# EAGLE board 13490-Pi_grammer_MAIN-panel.v10 (EAGLE 7.5.0), part 1 of 2
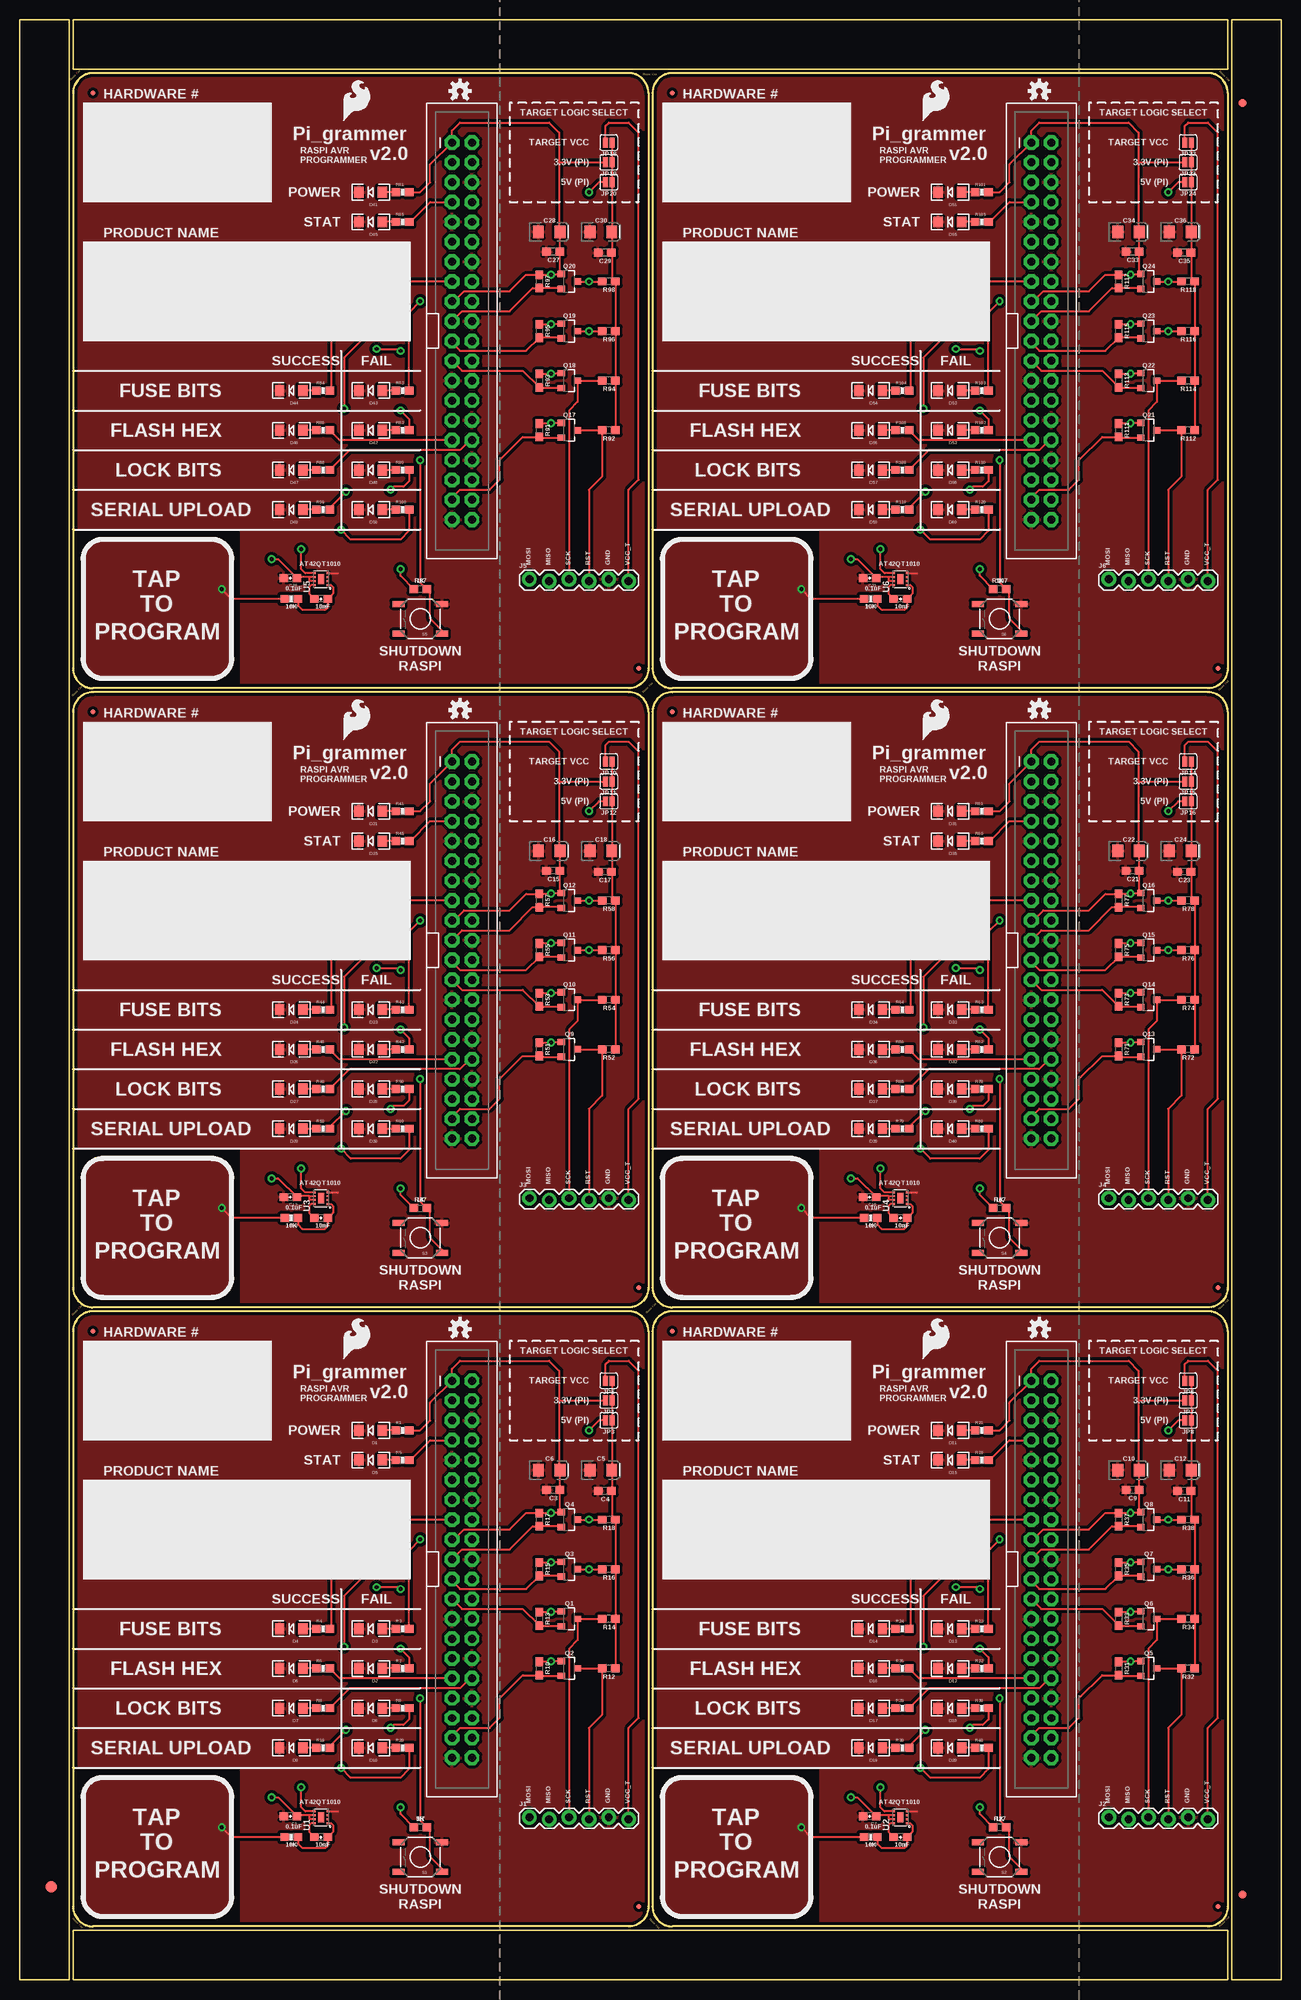
[diagram p0: board, top side]
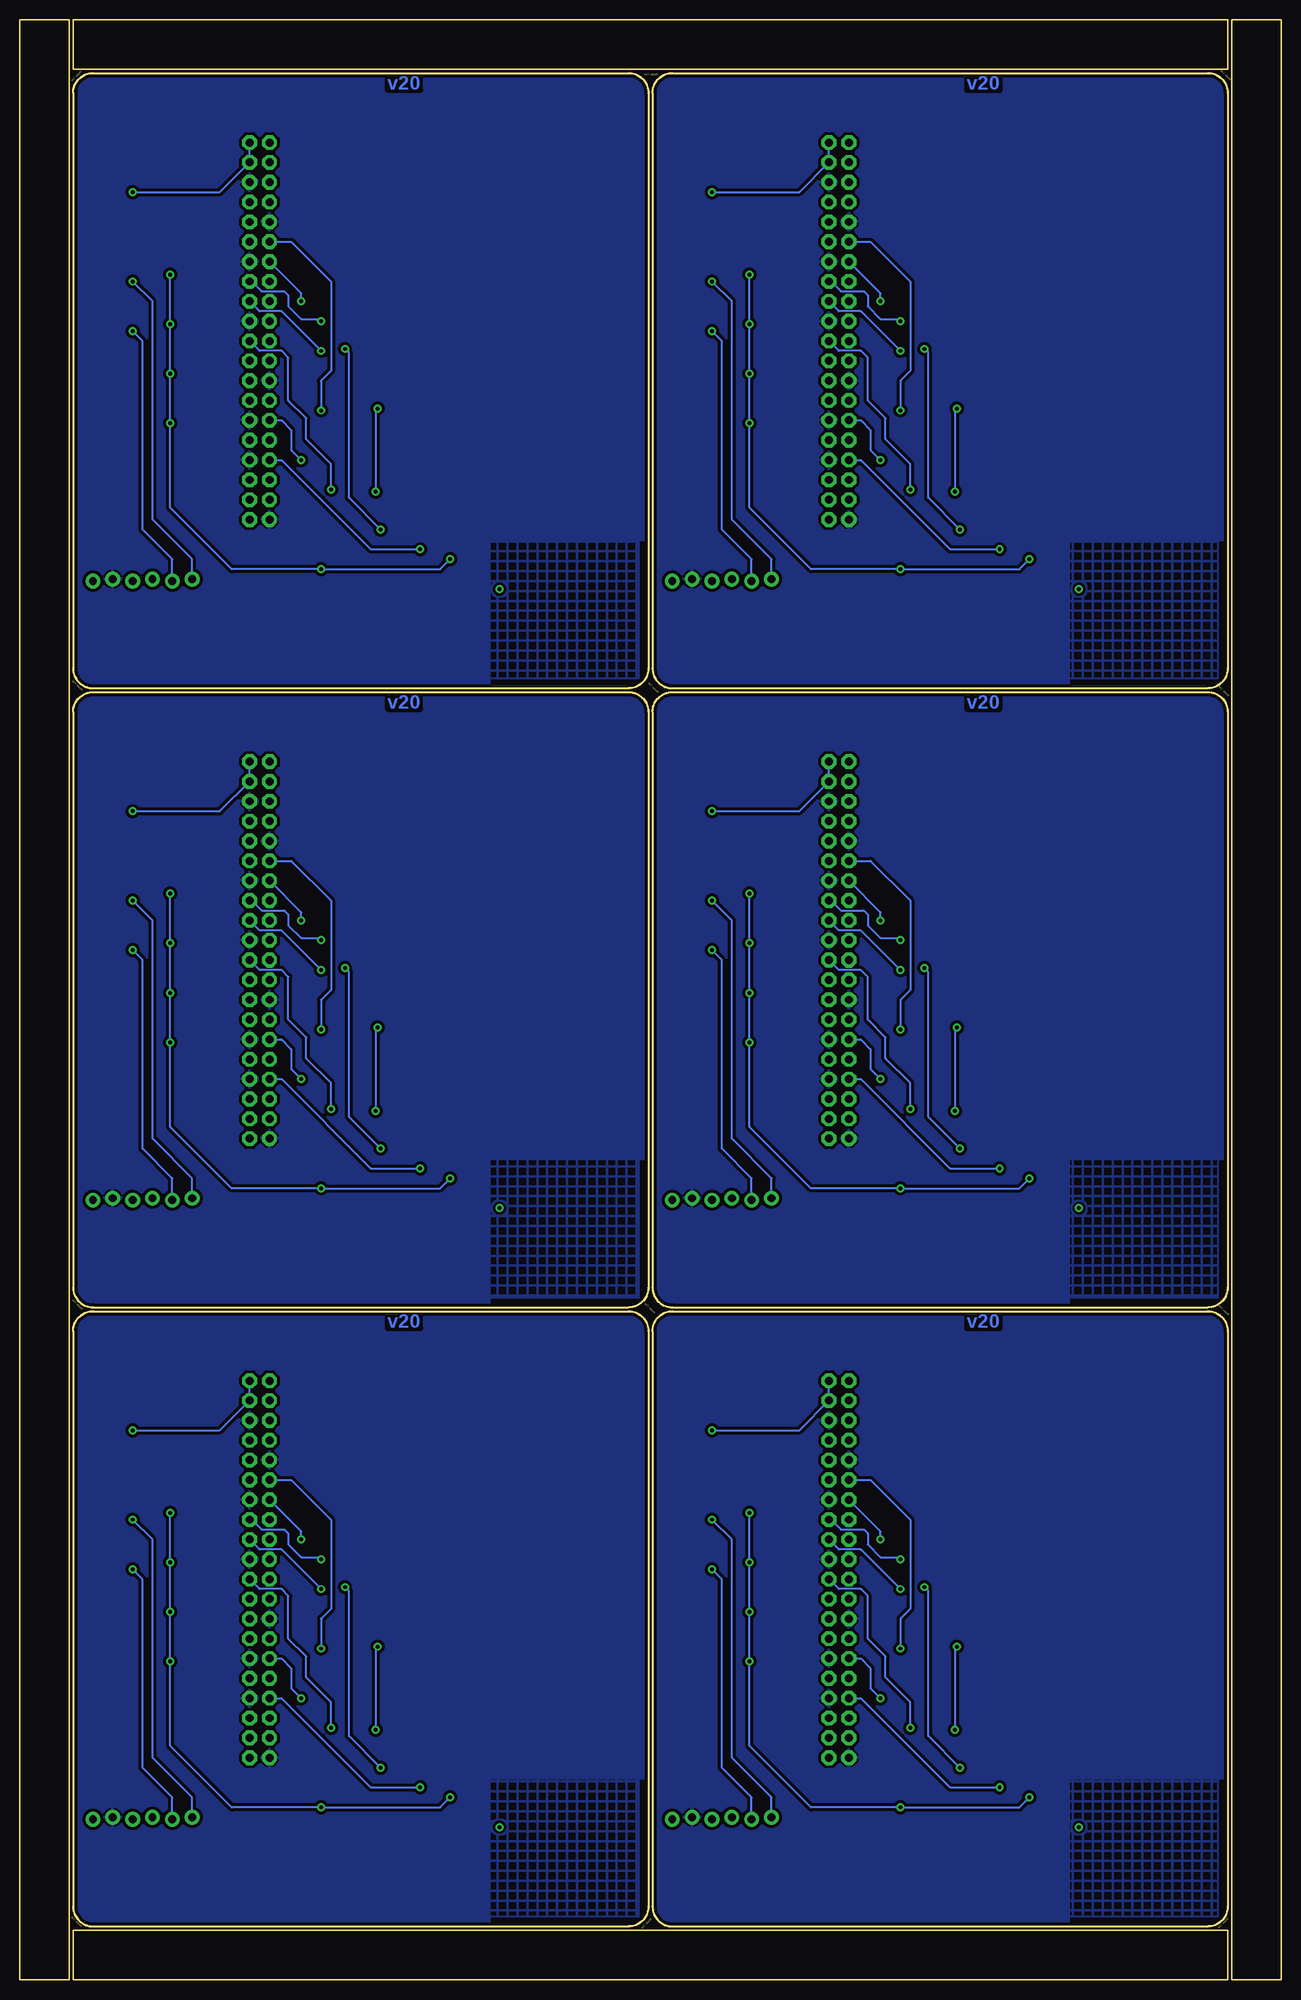
[diagram p1: board, bottom side, seen from below]

Size 161.54 x 250.95 mm. Coordinates in mm from the lower left corner, seen from the top.
Outline: 79.25,0 6.86,0 6.86,6.35 29.72,6.35
Outline: 27.18,6.35 154.69,6.35 154.69,0 76.71,0
Outline: 6.35,72.39 6.35,0 0,0 0,22.86
Outline: 0,20.32 0,250.95 6.35,250.95 6.35,69.85
Outline: 82.3,250.95 154.69,250.95 154.69,244.6 131.83,244.6
Outline: 134.37,244.6 6.86,244.6 6.86,250.95 84.84,250.95
Outline: 155.19,178.56 155.19,250.95 161.54,250.95 161.54,228.09
Outline: 161.54,230.63 161.54,0 155.19,0 155.19,181.1
Outline: 80.52,83.06 arc90 77.98,85.6 9.4,85.6 arc90 6.86,83.06 6.86,9.4 arc90 9.4,6.86 77.98,6.86 arc90 80.52,9.4 80.52,83.06
Outline: 154.69,83.06 arc90 152.15,85.6 83.57,85.6 arc90 81.03,83.06 81.03,9.4 arc90 83.57,6.86 152.15,6.86 arc90 154.69,9.4 154.69,83.06
Outline: 80.52,162.31 arc90 77.98,164.85 9.4,164.85 arc90 6.86,162.31 6.86,88.65 arc90 9.4,86.11 77.98,86.11 arc90 80.52,88.65 80.52,162.31
Outline: 154.69,162.31 arc90 152.15,164.85 83.57,164.85 arc90 81.03,162.31 81.03,88.65 arc90 83.57,86.11 152.15,86.11 arc90 154.69,88.65 154.69,162.31
Outline: 80.52,241.55 arc90 77.98,244.09 9.4,244.09 arc90 6.86,241.55 6.86,167.89 arc90 9.4,165.35 77.98,165.35 arc90 80.52,167.89 80.52,241.55
Outline: 154.69,241.55 arc90 152.15,244.09 83.57,244.09 arc90 81.03,241.55 81.03,167.89 arc90 83.57,165.35 152.15,165.35 arc90 154.69,167.89 154.69,241.55
Copper layers (1*16): Top 0.035mm / dielectric 1.5mm / Bottom 0.035mm
Design rules "SparkFun-2-layer *": minimum track width 10mil, minimum drill 20mil, track to track 8mil, track to pad 8mil, pad to pad 8mil, via to via 8mil, smd to smd 8mil, copper to edge 8mil, drill to drill 8mil, minimum pad ring 12mil, minimum via ring 10mil, stop-mask expansion 4mil, vias tented up to drill 20mil, thermal gap 10mil

## Footprints (pad centres in the part's own frame; a part is rotated, then mirrored left to right if it is on the bottom)
0603-CAP = smd 1.1 x 1: 1 -0.85,0; 2 0.85,0
0603 = smd 1.1 x 1: 1 -0.85,0; 2 0.85,0
EIA3216 = smd 1.4 x 1.6: + 1.4,0; - -1.4,0
LED-1206 = smd 1.2 x 1.4: A -1.5,0; C 1.5,0
FIDUCIAL-1.5X3 = smd 1.5 x 1.5: 1 0,0
FIDUCIAL-1X2 = smd 1 x 1: 1 0,0
MICRO-FIDUCIAL = smd 0.635 x 0.635: 1 0,0
1X06_LOCK = drill 1.016 pad 1.88: 1 0,0; 2 2.54,-0.254; 3 5.08,0; 4 7.62,-0.254; 5 10.16,0; 6 12.7,-0.254
SMT-JUMPER_2_NO_SILK = smd 0.635 x 1.27: 1 -0.406,0; 2 0.406,0
2X20-SHROUDED = drill 1.016 pad 1.88 octagon: 1 -1.27,24.13; 2 1.27,24.13; 3 -1.27,21.59; 4 1.27,21.59; 5 -1.27,19.05; 6 1.27,19.05; 7 -1.27,16.51; 8 1.27,16.51; 9 -1.27,13.97; 10 1.27,13.97; 11 -1.27,11.43; 12 1.27,11.43; 13 -1.27,8.89; 14 1.27,8.89; 15 -1.27,6.35; 16 1.27,6.35; 17 -1.27,3.81; 18 1.27,3.81; 19 -1.27,1.27; 20 1.27,1.27; 21 -1.27,-1.27; 22 1.27,-1.27; 23 -1.27,-3.81; 24 1.27,-3.81; 25 -1.27,-6.35; 26 1.27,-6.35; 27 -1.27,-8.89; 28 1.27,-8.89; 29 -1.27,-11.43; 30 1.27,-11.43; 31 -1.27,-13.97; 32 1.27,-13.97; 33 -1.27,-16.51; 34 1.27,-16.51; 35 -1.27,-19.05; 36 1.27,-19.05; 37 -1.27,-21.59; 38 1.27,-21.59; 39 -1.27,-24.13; 40 1.27,-24.13
SOT23-3 = smd 0.8 x 0.9: 1 -0.95,-1; 2 0.95,-1; 3 0,1.1
0603-RES = smd 1.1 x 1: 1 -0.85,0; 2 0.85,0
TACTILE-SWITCH-SMD = smd 1.524 x 0.762: 1 -2.794,1.905; 2 2.794,1.905; 3 -2.794,-1.905; 4 2.794,-1.905
UDFN/USON_8_PAD = smd 0.25 x 0.3: 1 -0.75,-0.852; 2 -0.25,-0.852; 3 0.25,-0.852; 4 0.75,-0.852; 5 0.75,0.852; 6 0.25,0.852; 7 -0.25,0.852; 8 -0.75,0.852 | smd 1.3 x 0.8: P$1 0,0

## Placement (x,y rotation side)
C1  0.1uF  [0603-CAP]  34.67,20.95 180 top
C2  10nF  [0603-CAP]  38.61,18.29 180 top
C3  0.1uF  [0603]  68.33,62.74 180 top
C4  0.1uF  [0603]  74.93,62.61 180 top
C5  10uF  [EIA3216]  74.42,65.28 0 top
C6  10uF  [EIA3216]  67.82,65.28 0 top
C7  0.1uF  [0603-CAP]  108.84,20.95 180 top
C8  10nF  [0603-CAP]  112.78,18.29 180 top
C9  0.1uF  [0603]  142.49,62.74 180 top
C10  10uF  [EIA3216]  141.99,65.28 0 top
C11  0.1uF  [0603]  149.1,62.61 180 top
C12  10uF  [EIA3216]  148.59,65.28 0 top
C13  0.1uF  [0603-CAP]  34.67,100.2 180 top
C14  10nF  [0603-CAP]  38.61,97.54 180 top
C15  0.1uF  [0603]  68.33,141.99 180 top
C16  10uF  [EIA3216]  67.82,144.53 0 top
C17  0.1uF  [0603]  74.93,141.86 180 top
C18  10uF  [EIA3216]  74.42,144.53 0 top
C19  0.1uF  [0603-CAP]  108.84,100.2 180 top
C20  10nF  [0603-CAP]  112.78,97.54 180 top
C21  0.1uF  [0603]  142.49,141.99 180 top
C22  10uF  [EIA3216]  141.99,144.53 0 top
C23  0.1uF  [0603]  149.1,141.86 180 top
C24  10uF  [EIA3216]  148.59,144.53 0 top
C25  0.1uF  [0603-CAP]  34.67,179.45 180 top
C26  10nF  [0603-CAP]  38.61,176.78 180 top
C27  0.1uF  [0603]  68.33,221.23 180 top
C28  10uF  [EIA3216]  67.82,223.77 0 top
C29  0.1uF  [0603]  74.93,221.11 180 top
C30  10uF  [EIA3216]  74.42,223.77 0 top
C31  0.1uF  [0603-CAP]  108.84,179.45 180 top
C32  10nF  [0603-CAP]  112.78,176.78 180 top
C33  0.1uF  [0603]  142.49,221.23 180 top
C34  10uF  [EIA3216]  141.99,223.77 0 top
C35  0.1uF  [0603]  149.1,221.11 180 top
C36  10uF  [EIA3216]  148.59,223.77 0 top
D1  GREEN  [LED-1206]  44.96,70.36 180 top
D2  RED  [LED-1206]  44.96,39.88 180 top
D3  RED  [LED-1206]  44.96,44.96 180 top
D4  GREEN  [LED-1206]  34.8,44.96 180 top
D5  GREEN  [LED-1206]  44.96,66.55 180 top
D6  GREEN  [LED-1206]  34.8,39.88 180 top
D7  GREEN  [LED-1206]  34.8,34.8 180 top
D8  RED  [LED-1206]  44.96,34.8 180 top
D9  GREEN  [LED-1206]  34.8,29.72 180 top
D10  RED  [LED-1206]  44.96,29.72 180 top
D11  GREEN  [LED-1206]  119.13,70.36 180 top
D12  RED  [LED-1206]  119.13,39.88 180 top
D13  RED  [LED-1206]  119.13,44.96 180 top
D14  GREEN  [LED-1206]  108.97,44.96 180 top
D15  GREEN  [LED-1206]  119.13,66.55 180 top
D16  GREEN  [LED-1206]  108.97,39.88 180 top
D17  GREEN  [LED-1206]  108.97,34.8 180 top
D18  RED  [LED-1206]  119.13,34.8 180 top
D19  GREEN  [LED-1206]  108.97,29.72 180 top
D20  RED  [LED-1206]  119.13,29.72 180 top
D21  GREEN  [LED-1206]  44.96,149.61 180 top
D22  RED  [LED-1206]  44.96,119.13 180 top
D23  RED  [LED-1206]  44.96,124.21 180 top
D24  GREEN  [LED-1206]  34.8,124.21 180 top
D25  GREEN  [LED-1206]  44.96,145.8 180 top
D26  GREEN  [LED-1206]  34.8,119.13 180 top
D27  GREEN  [LED-1206]  34.8,114.05 180 top
D28  RED  [LED-1206]  44.96,114.05 180 top
D29  GREEN  [LED-1206]  34.8,108.97 180 top
D30  RED  [LED-1206]  44.96,108.97 180 top
D31  GREEN  [LED-1206]  119.13,149.61 180 top
D32  RED  [LED-1206]  119.13,119.13 180 top
D33  RED  [LED-1206]  119.13,124.21 180 top
D34  GREEN  [LED-1206]  108.97,124.21 180 top
D35  GREEN  [LED-1206]  119.13,145.8 180 top
D36  GREEN  [LED-1206]  108.97,119.13 180 top
D37  GREEN  [LED-1206]  108.97,114.05 180 top
D38  RED  [LED-1206]  119.13,114.05 180 top
D39  GREEN  [LED-1206]  108.97,108.97 180 top
D40  RED  [LED-1206]  119.13,108.97 180 top
D41  GREEN  [LED-1206]  44.96,228.85 180 top
D42  RED  [LED-1206]  44.96,198.37 180 top
D43  RED  [LED-1206]  44.96,203.45 180 top
D44  GREEN  [LED-1206]  34.8,203.45 180 top
D45  GREEN  [LED-1206]  44.96,225.04 180 top
D46  GREEN  [LED-1206]  34.8,198.37 180 top
D47  GREEN  [LED-1206]  34.8,193.29 180 top
D48  RED  [LED-1206]  44.96,193.29 180 top
D49  GREEN  [LED-1206]  34.8,188.21 180 top
D50  RED  [LED-1206]  44.96,188.21 180 top
D51  GREEN  [LED-1206]  119.13,228.85 180 top
D52  RED  [LED-1206]  119.13,198.37 180 top
D53  RED  [LED-1206]  119.13,203.45 180 top
D54  GREEN  [LED-1206]  108.97,203.45 180 top
D55  GREEN  [LED-1206]  119.13,225.04 180 top
D56  GREEN  [LED-1206]  108.97,198.37 180 top
D57  GREEN  [LED-1206]  108.97,193.29 180 top
D58  RED  [LED-1206]  119.13,193.29 180 top
D59  GREEN  [LED-1206]  108.97,188.21 180 top
D60  RED  [LED-1206]  119.13,188.21 180 top
E$1  [FIDUCIAL-1.5X3]  4.06,11.94 0 top
E$7  [FIDUCIAL-1X2]  156.59,240.28 180 top
E$8  [FIDUCIAL-1X2]  156.59,10.92 0 top
FD1  FIDUCIALUFIDUCIAL  [MICRO-FIDUCIAL]  9.4,83.06 0 top
FD2  FIDUCIALUFIDUCIAL  [MICRO-FIDUCIAL]  79.25,9.4 0 top
FD3  FIDUCIALUFIDUCIAL  [MICRO-FIDUCIAL]  83.57,83.06 0 top
FD4  FIDUCIALUFIDUCIAL  [MICRO-FIDUCIAL]  153.42,9.4 0 top
FD5  FIDUCIALUFIDUCIAL  [MICRO-FIDUCIAL]  9.4,162.31 0 top
FD6  FIDUCIALUFIDUCIAL  [MICRO-FIDUCIAL]  79.25,88.65 0 top
FD7  FIDUCIALUFIDUCIAL  [MICRO-FIDUCIAL]  83.57,162.31 0 top
FD8  FIDUCIALUFIDUCIAL  [MICRO-FIDUCIAL]  153.42,88.65 0 top
FD9  FIDUCIALUFIDUCIAL  [MICRO-FIDUCIAL]  9.4,241.55 0 top
FD10  FIDUCIALUFIDUCIAL  [MICRO-FIDUCIAL]  79.25,167.89 0 top
FD11  FIDUCIALUFIDUCIAL  [MICRO-FIDUCIAL]  83.57,241.55 0 top
FD12  FIDUCIALUFIDUCIAL  [MICRO-FIDUCIAL]  153.42,167.89 0 top
J1  TARGET_copy  [1X06_LOCK]  65.28,20.83 0 top
J2  TARGET_copy  [1X06_LOCK]  139.45,20.83 0 top
J3  TARGET_copy  [1X06_LOCK]  65.28,100.08 0 top
J4  TARGET_copy  [1X06_LOCK]  139.45,100.08 0 top
J5  TARGET_copy  [1X06_LOCK]  65.28,179.32 0 top
J6  TARGET_copy  [1X06_LOCK]  139.45,179.32 0 top
JP1  [SMT-JUMPER_2_NO_SILK]  75.44,74.17 180 top
JP2  RASPBERRYPI-B+-GPIO  [2X20-SHROUDED]  56.64,52.58 0 top
JP3  [SMT-JUMPER_2_NO_SILK]  75.44,71.63 180 top
JP4  RASPBERRYPI-B+-GPIO  [2X20-SHROUDED]  130.81,52.58 0 top
JP5  [SMT-JUMPER_2_NO_SILK]  75.44,76.71 180 top
JP6  [SMT-JUMPER_2_NO_SILK]  149.61,76.71 180 top
JP7  [SMT-JUMPER_2_NO_SILK]  149.61,74.17 180 top
JP8  [SMT-JUMPER_2_NO_SILK]  149.61,71.63 180 top
JP9  RASPBERRYPI-B+-GPIO  [2X20-SHROUDED]  56.64,131.83 0 top
JP10  [SMT-JUMPER_2_NO_SILK]  75.44,155.96 180 top
JP11  [SMT-JUMPER_2_NO_SILK]  75.44,153.42 180 top
JP12  [SMT-JUMPER_2_NO_SILK]  75.44,150.88 180 top
JP13  RASPBERRYPI-B+-GPIO  [2X20-SHROUDED]  130.81,131.83 0 top
JP14  [SMT-JUMPER_2_NO_SILK]  149.61,155.96 180 top
JP15  [SMT-JUMPER_2_NO_SILK]  149.61,153.42 180 top
JP16  [SMT-JUMPER_2_NO_SILK]  149.61,150.88 180 top
JP17  RASPBERRYPI-B+-GPIO  [2X20-SHROUDED]  56.64,211.07 0 top
JP18  [SMT-JUMPER_2_NO_SILK]  75.44,235.2 180 top
JP19  [SMT-JUMPER_2_NO_SILK]  75.44,232.66 180 top
JP20  [SMT-JUMPER_2_NO_SILK]  75.44,230.12 180 top
JP21  RASPBERRYPI-B+-GPIO  [2X20-SHROUDED]  130.81,211.07 0 top
JP22  [SMT-JUMPER_2_NO_SILK]  149.61,235.2 180 top
JP23  [SMT-JUMPER_2_NO_SILK]  149.61,232.66 180 top
JP24  [SMT-JUMPER_2_NO_SILK]  149.61,230.12 180 top
LOGO1  SFE_LOGO_FLAME.2_INCH  [SFE_LOGO_FLAME_.2]  41.15,79.25 0 top
LOGO2  OSHW-LOGOS  [OSHW-LOGO-S]  56.39,83.31 0 top
LOGO3  OSHW-LOGOS  [OSHW-LOGO-S]  130.56,83.31 0 top
LOGO4  SFE_LOGO_FLAME.2_INCH  [SFE_LOGO_FLAME_.2]  115.32,79.25 0 top
LOGO5  OSHW-LOGOS  [OSHW-LOGO-S]  56.39,162.56 0 top
LOGO6  SFE_LOGO_FLAME.2_INCH  [SFE_LOGO_FLAME_.2]  41.15,158.5 0 top
LOGO7  OSHW-LOGOS  [OSHW-LOGO-S]  130.56,162.56 0 top
LOGO8  SFE_LOGO_FLAME.2_INCH  [SFE_LOGO_FLAME_.2]  115.32,158.5 0 top
LOGO9  OSHW-LOGOS  [OSHW-LOGO-S]  56.39,241.81 0 top
LOGO10  SFE_LOGO_FLAME.2_INCH  [SFE_LOGO_FLAME_.2]  41.15,237.74 0 top
LOGO11  OSHW-LOGOS  [OSHW-LOGO-S]  130.56,241.81 0 top
LOGO12  SFE_LOGO_FLAME.2_INCH  [SFE_LOGO_FLAME_.2]  115.32,237.74 0 top
Q1  220mA/50V/3.5Ω  [SOT23-3]  70.36,46.23 270 top
Q2  220mA/50V/3.5Ω  [SOT23-3]  70.36,39.88 270 top
Q3  220mA/50V/3.5Ω  [SOT23-3]  70.36,52.58 270 top
Q4  220mA/50V/3.5Ω  [SOT23-3]  70.36,58.93 270 top
Q5  220mA/50V/3.5Ω  [SOT23-3]  144.53,39.88 270 top
Q6  220mA/50V/3.5Ω  [SOT23-3]  144.53,46.23 270 top
Q7  220mA/50V/3.5Ω  [SOT23-3]  144.53,52.58 270 top
Q8  220mA/50V/3.5Ω  [SOT23-3]  144.53,58.93 270 top
Q9  220mA/50V/3.5Ω  [SOT23-3]  70.36,119.13 270 top
Q10  220mA/50V/3.5Ω  [SOT23-3]  70.36,125.48 270 top
Q11  220mA/50V/3.5Ω  [SOT23-3]  70.36,131.83 270 top
Q12  220mA/50V/3.5Ω  [SOT23-3]  70.36,138.18 270 top
Q13  220mA/50V/3.5Ω  [SOT23-3]  144.53,119.13 270 top
Q14  220mA/50V/3.5Ω  [SOT23-3]  144.53,125.48 270 top
Q15  220mA/50V/3.5Ω  [SOT23-3]  144.53,131.83 270 top
Q16  220mA/50V/3.5Ω  [SOT23-3]  144.53,138.18 270 top
Q17  220mA/50V/3.5Ω  [SOT23-3]  70.36,198.37 270 top
Q18  220mA/50V/3.5Ω  [SOT23-3]  70.36,204.72 270 top
Q19  220mA/50V/3.5Ω  [SOT23-3]  70.36,211.07 270 top
Q20  220mA/50V/3.5Ω  [SOT23-3]  70.36,217.42 270 top
Q21  220mA/50V/3.5Ω  [SOT23-3]  144.53,198.37 270 top
Q22  220mA/50V/3.5Ω  [SOT23-3]  144.53,204.72 270 top
Q23  220mA/50V/3.5Ω  [SOT23-3]  144.53,211.07 270 top
Q24  220mA/50V/3.5Ω  [SOT23-3]  144.53,217.42 270 top
R1  1K  [0603-RES]  49.02,70.36 0 top
R2  1K  [0603-RES]  49.02,39.88 0 top
R3  1K  [0603-RES]  49.02,44.96 0 top
R4  1K  [0603-RES]  38.86,44.96 0 top
R5  1K  [0603-RES]  49.02,66.55 0 top
R6  1K  [0603-RES]  38.86,39.88 0 top
R7  1k  [0603]  51.31,19.56 0 top
R8  1K  [0603-RES]  38.86,34.8 0 top
R9  1K  [0603-RES]  49.02,34.8 0 top
R10  10k  [0603]  66.55,39.88 270 top
R11  10k  [0603-RES]  34.8,18.29 180 top
R12  10k  [0603]  75.44,39.88 180 top
R13  10k  [0603]  66.55,46.23 270 top
R14  10k  [0603]  75.44,46.23 180 top
R15  10k  [0603]  66.55,52.58 270 top
R16  10k  [0603]  75.44,52.58 180 top
R17  10k  [0603]  66.55,58.93 270 top
R18  10k  [0603]  75.44,58.93 180 top
R19  1K  [0603-RES]  38.86,29.72 0 top
R20  1K  [0603-RES]  49.02,29.72 0 top
R21  1K  [0603-RES]  123.19,70.36 0 top
R22  1K  [0603-RES]  123.19,39.88 0 top
R23  1K  [0603-RES]  123.19,44.96 0 top
R24  1K  [0603-RES]  113.03,44.96 0 top
R25  1K  [0603-RES]  123.19,66.55 0 top
R26  1K  [0603-RES]  113.03,39.88 0 top
R27  1k  [0603]  125.48,19.56 0 top
R28  1K  [0603-RES]  113.03,34.8 0 top
R29  10k  [0603-RES]  108.97,18.29 180 top
R30  1K  [0603-RES]  123.19,34.8 0 top
R31  10k  [0603]  140.72,39.88 270 top
R32  10k  [0603]  149.61,39.88 180 top
R33  10k  [0603]  140.72,46.23 270 top
R34  10k  [0603]  149.61,46.23 180 top
R35  10k  [0603]  140.72,52.58 270 top
R36  10k  [0603]  149.61,52.58 180 top
R37  10k  [0603]  140.72,58.93 270 top
R38  10k  [0603]  149.61,58.93 180 top
R39  1K  [0603-RES]  113.03,29.72 0 top
R40  1K  [0603-RES]  123.19,29.72 0 top
R41  1K  [0603-RES]  49.02,149.61 0 top
R42  1K  [0603-RES]  49.02,119.13 0 top
R43  1K  [0603-RES]  49.02,124.21 0 top
R44  1K  [0603-RES]  38.86,124.21 0 top
R45  1K  [0603-RES]  49.02,145.8 0 top
R46  1K  [0603-RES]  38.86,119.13 0 top
R47  1k  [0603]  51.31,98.81 0 top
R48  1K  [0603-RES]  38.86,114.05 0 top
R49  10k  [0603-RES]  34.8,97.54 180 top
R50  1K  [0603-RES]  49.02,114.05 0 top
R51  10k  [0603]  66.55,119.13 270 top
R52  10k  [0603]  75.44,119.13 180 top
R53  10k  [0603]  66.55,125.48 270 top
R54  10k  [0603]  75.44,125.48 180 top
R55  10k  [0603]  66.55,131.83 270 top
R56  10k  [0603]  75.44,131.83 180 top
R57  10k  [0603]  66.55,138.18 270 top
R58  10k  [0603]  75.44,138.18 180 top
R59  1K  [0603-RES]  38.86,108.97 0 top
R60  1K  [0603-RES]  49.02,108.97 0 top
R61  1K  [0603-RES]  123.19,149.61 0 top
R62  1K  [0603-RES]  123.19,119.13 0 top
R63  1K  [0603-RES]  123.19,124.21 0 top
R64  1K  [0603-RES]  113.03,124.21 0 top
R65  1K  [0603-RES]  123.19,145.8 0 top
R66  1K  [0603-RES]  113.03,119.13 0 top
R67  1k  [0603]  125.48,98.81 0 top
R68  1K  [0603-RES]  113.03,114.05 0 top
R69  10k  [0603-RES]  108.97,97.54 180 top
R70  1K  [0603-RES]  123.19,114.05 0 top
R71  10k  [0603]  140.72,119.13 270 top
R72  10k  [0603]  149.61,119.13 180 top
R73  10k  [0603]  140.72,125.48 270 top
R74  10k  [0603]  149.61,125.48 180 top
R75  10k  [0603]  140.72,131.83 270 top
R76  10k  [0603]  149.61,131.83 180 top
R77  10k  [0603]  140.72,138.18 270 top
R78  10k  [0603]  149.61,138.18 180 top
R79  1K  [0603-RES]  113.03,108.97 0 top
R80  1K  [0603-RES]  123.19,108.97 0 top
R81  1K  [0603-RES]  49.02,228.85 0 top
R82  1K  [0603-RES]  49.02,198.37 0 top
R83  1K  [0603-RES]  49.02,203.45 0 top
R84  1K  [0603-RES]  38.86,203.45 0 top
R85  1K  [0603-RES]  49.02,225.04 0 top
R86  1K  [0603-RES]  38.86,198.37 0 top
R87  1k  [0603]  51.31,178.05 0 top
R88  1K  [0603-RES]  38.86,193.29 0 top
R89  10k  [0603-RES]  34.8,176.78 180 top
R90  1K  [0603-RES]  49.02,193.29 0 top
R91  10k  [0603]  66.55,198.37 270 top
R92  10k  [0603]  75.44,198.37 180 top
R93  10k  [0603]  66.55,204.72 270 top
R94  10k  [0603]  75.44,204.72 180 top
R95  10k  [0603]  66.55,211.07 270 top
R96  10k  [0603]  75.44,211.07 180 top
R97  10k  [0603]  66.55,217.42 270 top
R98  10k  [0603]  75.44,217.42 180 top
R99  1K  [0603-RES]  38.86,188.21 0 top
R100  1K  [0603-RES]  49.02,188.21 0 top
R101  1K  [0603-RES]  123.19,228.85 0 top
R102  1K  [0603-RES]  123.19,198.37 0 top
R103  1K  [0603-RES]  123.19,203.45 0 top
R104  1K  [0603-RES]  113.03,203.45 0 top
R105  1K  [0603-RES]  123.19,225.04 0 top
R106  1K  [0603-RES]  113.03,198.37 0 top
R107  1k  [0603]  125.48,178.05 0 top
R108  1K  [0603-RES]  113.03,193.29 0 top
R109  10k  [0603-RES]  108.97,176.78 180 top
R110  1K  [0603-RES]  123.19,193.29 0 top
R111  10k  [0603]  140.72,198.37 270 top
R112  10k  [0603]  149.61,198.37 180 top
R113  10k  [0603]  140.72,204.72 270 top
R114  10k  [0603]  149.61,204.72 180 top
R115  10k  [0603]  140.72,211.07 270 top
R116  10k  [0603]  149.61,211.07 180 top
R117  10k  [0603]  140.72,217.42 270 top
R118  10k  [0603]  149.61,217.42 180 top
R119  1K  [0603-RES]  113.03,188.21 0 top
R120  1K  [0603-RES]  123.19,188.21 0 top
S1  [TACTILE-SWITCH-SMD]  51.31,15.75 180 top
S2  [TACTILE-SWITCH-SMD]  125.48,15.75 180 top
S3  [TACTILE-SWITCH-SMD]  51.31,95 180 top
S4  [TACTILE-SWITCH-SMD]  125.48,95 180 top
S5  [TACTILE-SWITCH-SMD]  51.31,174.24 180 top
S6  [TACTILE-SWITCH-SMD]  125.48,174.24 180 top
U1  AT42QT1010UDFN  [UDFN/USON_8_PAD]  38.61,20.83 90 top
U2  AT42QT1010UDFN  [UDFN/USON_8_PAD]  112.78,20.83 90 top
U3  AT42QT1010UDFN  [UDFN/USON_8_PAD]  38.61,100.08 90 top
U4  AT42QT1010UDFN  [UDFN/USON_8_PAD]  112.78,100.08 90 top
U5  AT42QT1010UDFN  [UDFN/USON_8_PAD]  38.61,179.32 90 top
U6  AT42QT1010UDFN  [UDFN/USON_8_PAD]  112.78,179.32 90 top

## Library data of the parts
C1 C3 C4 C7 C9 C11 C13 C15 C17 C19 C21 C23 C25 C27 C29 C31 C33 C35 = SparkFun-Capacitors; PROD_ID: CAP-00810
C2 C8 C14 C20 C26 C32 = SparkFun-Capacitors; PROD_ID: CAP-00867
C5 C6 C10 C12 C16 C18 C22 C24 C28 C30 C34 C36 = SparkFun-Capacitors; PROD_ID: CAP-00811
D1 D4-D7 D9 D11 D14-D17 D19 D21 D24-D27 D29 D31 D34-D37 D39 D41 D44-D47 D49 D51 D54-D57 D59 = SparkFun-LED; PROD_ID: DIO-00862
D2 D3 D8 D10 D12 D13 D18 D20 D22 D23 D28 D30 D32 D33 D38 D40 D42 D43 D48 D50 D52 D53 D58 D60 = SparkFun-LED; PROD_ID: DIO-09912
E$1 = SparkFun-Retired
E$7 E$8 FD1-FD12 LOGO1-LOGO12 = SparkFun-Aesthetics
J1-J6 = SparkFun-Connectors; PROD_ID: CONN-10140
JP1 JP3 JP5-JP8 JP10-JP12 JP14-JP16 JP18-JP20 JP22-JP24 = SparkFun-Jumpers
JP2 JP4 JP9 JP13 JP17 JP21 = SparkFun-Boards
Q1-Q24 = SparkFun-DiscreteSemi; PROD_ID: TRANS-00830
R1-R9 R19-R28 R30 R39-R48 R50 R59-R68 R70 R79-R88 R90 R99-R108 R110 R119 R120 = SparkFun-Resistors; PROD_ID: RES-07856
R10-R18 R29 R31-R38 R49 R51-R58 R69 R71-R78 R89 R91-R98 R109 R111-R118 = SparkFun-Resistors; PROD_ID: RES-00824
S1-S6 = SparkFun-Electromechanical; PROD_ID: SWCH-08247
U1-U6 = Testing; PROD_ID: IC-11778

## Nets
3.3V: C1.1 C3.1 C6.+ JP1.2 JP2.1 JP2.17 Q1.1 Q2.1 Q3.1 Q4.1 R1.2 R7.1 R10.1 R13.1 R15.1 R17.1 U1.6 U1.7
3.3V1: C7.1 C9.1 C10.+ JP4.1 JP4.17 JP7.2 Q5.1 Q6.1 Q7.1 Q8.1 R21.2 R27.1 R31.1 R33.1 R35.1 R37.1 U2.6 U2.7
3.3V2: C13.1 C15.1 C16.+ JP9.1 JP9.17 JP11.2 Q9.1 Q10.1 Q11.1 Q12.1 R41.2 R47.1 R51.1 R53.1 R55.1 R57.1 U3.6 U3.7
3.3V3: C19.1 C21.1 C22.+ JP13.1 JP13.17 JP15.2 Q13.1 Q14.1 Q15.1 Q16.1 R61.2 R67.1 R71.1 R73.1 R75.1 R77.1 U4.6 U4.7
3.3V4: C25.1 C27.1 C28.+ JP17.1 JP17.17 JP19.2 Q17.1 Q18.1 Q19.1 Q20.1 R81.2 R87.1 R91.1 R93.1 R95.1 R97.1 U5.6 U5.7
3.3V5: C31.1 C33.1 C34.+ JP21.1 JP21.17 JP23.2 Q21.1 Q22.1 Q23.1 Q24.1 R101.2 R107.1 R111.1 R113.1 R115.1 R117.1 U6.6 U6.7
5V: JP2.2 JP2.4 JP3.2
5V1: JP4.2 JP4.4 JP8.2
5V2: JP9.2 JP9.4 JP12.2
5V3: JP13.2 JP13.4 JP16.2
5V4: JP17.2 JP17.4 JP20.2
5V5: JP21.2 JP21.4 JP24.2
CAPSENSE: JP2.33 U1.5
CAPSENSE1: JP4.33 U2.5
CAPSENSE2: JP9.33 U3.5
CAPSENSE3: JP13.33 U4.5
CAPSENSE4: JP17.33 U5.5
CAPSENSE5: JP21.33 U6.5
CE0: JP2.24
CE1: JP2.26
CE2: JP4.24
CE3: JP4.26
CE4: JP9.24
CE5: JP9.26
CE6: JP13.24
CE7: JP13.26
CE8: JP17.24
CE9: JP17.26
CE10: JP21.24
CE11: JP21.26
FLASH_HEX_FAIL: JP2.11 R2.2
FLASH_HEX_FAIL1: JP4.11 R22.2
FLASH_HEX_FAIL2: JP9.11 R42.2
FLASH_HEX_FAIL3: JP13.11 R62.2
FLASH_HEX_FAIL4: JP17.11 R82.2
FLASH_HEX_FAIL5: JP21.11 R102.2
FLASH_HEX_PASS: JP2.31 R6.2
FLASH_HEX_PASS1: JP4.31 R26.2
FLASH_HEX_PASS2: JP9.31 R46.2
FLASH_HEX_PASS3: JP13.31 R66.2
FLASH_HEX_PASS4: JP17.31 R86.2
FLASH_HEX_PASS5: JP21.31 R106.2
FUSE_BITS_FAIL: JP2.13 R3.2
FUSE_BITS_FAIL1: JP4.13 R23.2
FUSE_BITS_FAIL2: JP9.13 R43.2
FUSE_BITS_FAIL3: JP13.13 R63.2
FUSE_BITS_FAIL4: JP17.13 R83.2
FUSE_BITS_FAIL5: JP21.13 R103.2
FUSE_BITS_PASS: JP2.15 R4.2
FUSE_BITS_PASS1: JP4.15 R24.2
FUSE_BITS_PASS2: JP9.15 R44.2
FUSE_BITS_PASS3: JP13.15 R64.2
FUSE_BITS_PASS4: JP17.15 R84.2
FUSE_BITS_PASS5: JP21.15 R104.2
GND: C1.2 C3.2 C4.2 C5.- C6.- D1.C D2.C D3.C D4.C D5.C D6.C D7.C D8.C D9.C D10.C J1.5 JP2.6 JP2.9 JP2.14 JP2.20 JP2.25 JP2.30 JP2.34 JP2.39 S1.3 U1.4
GND1: C7.2 C9.2 C10.- C11.2 C12.- D11.C D12.C D13.C D14.C D15.C D16.C D17.C D18.C D19.C D20.C J2.5 JP4.6 JP4.9 JP4.14 JP4.20 JP4.25 JP4.30 JP4.34 JP4.39 S2.3 U2.4
GND2: C13.2 C15.2 C16.- C17.2 C18.- D21.C D22.C D23.C D24.C D25.C D26.C D27.C D28.C D29.C D30.C J3.5 JP9.6 JP9.9 JP9.14 JP9.20 JP9.25 JP9.30 JP9.34 JP9.39 S3.3 U3.4
GND3: C19.2 C21.2 C22.- C23.2 C24.- D31.C D32.C D33.C D34.C D35.C D36.C D37.C D38.C D39.C D40.C J4.5 JP13.6 JP13.9 JP13.14 JP13.20 JP13.25 JP13.30 JP13.34 JP13.39 S4.3 U4.4
GND4: C25.2 C27.2 C28.- C29.2 C30.- D41.C D42.C D43.C D44.C D45.C D46.C D47.C D48.C D49.C D50.C J5.5 JP17.6 JP17.9 JP17.14 JP17.20 JP17.25 JP17.30 JP17.34 JP17.39 S5.3 U5.4
GND5: C31.2 C33.2 C34.- C35.2 C36.- D51.C D52.C D53.C D54.C D55.C D56.C D57.C D58.C D59.C D60.C J6.5 JP21.6 JP21.9 JP21.14 JP21.20 JP21.25 JP21.30 JP21.34 JP21.39 S6.3 U6.4
GP1: JP4.38
GP2: JP4.40
GP3: JP9.38
GP4: JP9.40
GP5: JP13.38
GP6: JP13.40
GP7: JP17.38
GP8: JP17.40
GP9: JP21.38
GP10: JP21.40
GP20: JP2.38
GP21: JP2.40
ID_SC: JP2.28
ID_SC1: JP4.28
ID_SC2: JP9.28
ID_SC3: JP13.28
ID_SC4: JP17.28
ID_SC5: JP21.28
ID_SD: JP2.27
ID_SD1: JP4.27
ID_SD2: JP9.27
ID_SD3: JP13.27
ID_SD4: JP17.27
ID_SD5: JP21.27
LOCK_BITS_FAIL: JP2.22 R9.2
LOCK_BITS_FAIL1: JP4.22 R30.2
LOCK_BITS_FAIL2: JP9.22 R50.2
LOCK_BITS_FAIL3: JP13.22 R70.2
LOCK_BITS_FAIL4: JP17.22 R90.2
LOCK_BITS_FAIL5: JP21.22 R110.2
LOCK_BITS_PASS: JP2.32 R8.2
LOCK_BITS_PASS1: JP4.32 R28.2
LOCK_BITS_PASS2: JP9.32 R48.2
LOCK_BITS_PASS3: JP13.32 R68.2
LOCK_BITS_PASS4: JP17.32 R88.2
LOCK_BITS_PASS5: JP21.32 R108.2
MISO: JP2.21 Q3.2 R15.2
MISO1: JP4.21 Q7.2 R35.2
MISO2: JP9.21 Q11.2 R55.2
MISO3: JP13.21 Q15.2 R75.2
MISO4: JP17.21 Q19.2 R95.2
MISO5: JP21.21 Q23.2 R115.2
MISO_T: J1.2 Q3.3 R16.2
MISO_T1: J2.2 Q7.3 R36.2
MISO_T2: J3.2 Q11.3 R56.2
MISO_T3: J4.2 Q15.3 R76.2
MISO_T4: J5.2 Q19.3 R96.2
MISO_T5: J6.2 Q23.3 R116.2
MOSI: JP2.19 Q4.2 R17.2
MOSI1: JP4.19 Q8.2 R37.2
MOSI2: JP9.19 Q12.2 R57.2
MOSI3: JP13.19 Q16.2 R77.2
MOSI4: JP17.19 Q20.2 R97.2
MOSI5: JP21.19 Q24.2 R117.2
MOSI_T: J1.1 Q4.3 R18.2
MOSI_T1: J2.1 Q8.3 R38.2
MOSI_T2: J3.1 Q12.3 R58.2
MOSI_T3: J4.1 Q16.3 R78.2
MOSI_T4: J5.1 Q20.3 R98.2
MOSI_T5: J6.1 Q24.3 R118.2
N$1: D6.A R6.1
N$2: D1.A R1.1
N$3: D2.A R2.1
N$4: D3.A R3.1
N$5: D7.A R8.1
N$6: D4.A R4.1
N$7: D5.A R5.1
N$8: D8.A R9.1
N$9: C4.1 C5.+ JP1.1 JP3.1 JP5.1 R12.1 R14.1 R16.1 R18.1
N$10: C2.2 U1.8
N$11: C2.1 R11.1 U1.1
N$12: D11.A R21.1
N$13: D9.A R19.1
N$14: D10.A R20.1
N$15: D12.A R22.1
N$16: D13.A R23.1
N$17: D14.A R24.1
N$18: D15.A R25.1
N$19: D16.A R26.1
N$20: D17.A R28.1
N$21: C8.2 U2.8
N$22: C8.1 R29.1 U2.1
N$23: D18.A R30.1
N$24: D19.A R39.1
N$25: D20.A R40.1
N$26: C11.1 C12.+ JP6.1 JP7.1 JP8.1 R32.1 R34.1 R36.1 R38.1
N$27: D21.A R41.1
N$28: D22.A R42.1
N$29: D23.A R43.1
N$30: D24.A R44.1
N$31: D25.A R45.1
N$32: D26.A R46.1
N$33: D27.A R48.1
N$34: C14.2 U3.8
N$35: C14.1 R49.1 U3.1
N$36: D28.A R50.1
N$37: D29.A R59.1
N$38: D30.A R60.1
N$39: C17.1 C18.+ JP10.1 JP11.1 JP12.1 R52.1 R54.1 R56.1 R58.1
N$40: D31.A R61.1
N$41: D32.A R62.1
N$42: D33.A R63.1
N$43: D34.A R64.1
N$44: D35.A R65.1
N$45: D36.A R66.1
N$46: D37.A R68.1
N$47: C20.2 U4.8
N$48: C20.1 R69.1 U4.1
N$49: D38.A R70.1
N$50: D39.A R79.1
N$51: D40.A R80.1
N$52: C23.1 C24.+ JP14.1 JP15.1 JP16.1 R72.1 R74.1 R76.1 R78.1
N$53: D41.A R81.1
N$54: D42.A R82.1
N$55: D43.A R83.1
N$56: D44.A R84.1
N$57: D45.A R85.1
N$58: D46.A R86.1
N$59: D47.A R88.1
N$60: C26.2 U5.8
N$61: C26.1 R89.1 U5.1
N$62: D48.A R90.1
N$63: D49.A R99.1
N$64: D50.A R100.1
N$65: C29.1 C30.+ JP18.1 JP19.1 JP20.1 R92.1 R94.1 R96.1 R98.1
N$66: D51.A R101.1
N$67: D52.A R102.1
N$68: D53.A R103.1
N$69: D54.A R104.1
N$70: D55.A R105.1
N$71: D56.A R106.1
N$72: D57.A R108.1
N$73: C32.2 U6.8
N$74: C32.1 R109.1 U6.1
N$75: D58.A R110.1
N$76: D59.A R119.1
N$77: D60.A R120.1
N$78: C35.1 C36.+ JP22.1 JP23.1 JP24.1 R112.1 R114.1 R116.1 R118.1
PAD: R11.2
PAD1: R29.2
PAD2: R49.2
PAD3: R69.2
PAD4: R89.2
PAD5: R109.2
RST: JP2.37 Q2.2 R10.2
RST1: JP4.37 Q5.2 R31.2
RST2: JP9.37 Q9.2 R51.2
RST3: JP13.37 Q13.2 R71.2
RST4: JP17.37 Q17.2 R91.2
RST5: JP21.37 Q21.2 R111.2
RST_T: J1.4 Q2.3 R12.2
RST_T1: J2.4 Q5.3 R32.2
RST_T2: J3.4 Q9.3 R52.2
RST_T3: J4.4 Q13.3 R72.2
RST_T4: J5.4 Q17.3 R92.2
RST_T5: J6.4 Q21.3 R112.2
RXI: JP2.10
RXI1: JP4.10
RXI2: JP9.10
RXI3: JP13.10
RXI4: JP17.10
RXI5: JP21.10
SCK: JP2.23 Q1.2 R13.2
SCK1: JP4.23 Q6.2 R33.2
SCK2: JP9.23 Q10.2 R53.2
SCK3: JP13.23 Q14.2 R73.2
SCK4: JP17.23 Q18.2 R93.2
SCK5: JP21.23 Q22.2 R113.2
SCK_T: J1.3 Q1.3 R14.2
SCK_T1: J2.3 Q6.3 R34.2
SCK_T2: J3.3 Q10.3 R54.2
SCK_T3: J4.3 Q14.3 R74.2
SCK_T4: J5.3 Q18.3 R94.2
SCK_T5: J6.3 Q22.3 R114.2
SCL: JP2.5
SCL1: JP4.5
SCL2: JP9.5
SCL3: JP13.5
SCL4: JP17.5
SCL5: JP21.5
SCRIPT: JP2.7 R5.2
SCRIPT1: JP4.7 R25.2
SCRIPT2: JP9.7 R45.2
SCRIPT3: JP13.7 R65.2
SCRIPT4: JP17.7 R85.2
SCRIPT5: JP21.7 R105.2
SDA: JP2.3
SDA1: JP4.3
SDA2: JP9.3
SDA3: JP13.3
SDA4: JP17.3
SDA5: JP21.3
SERIAL_UPLOAD_FAIL: JP2.18 R20.2
SERIAL_UPLOAD_FAIL1: JP4.18 R40.2
SERIAL_UPLOAD_FAIL2: JP9.18 R60.2
SERIAL_UPLOAD_FAIL3: JP13.18 R80.2
SERIAL_UPLOAD_FAIL4: JP17.18 R100.2
SERIAL_UPLOAD_FAIL5: JP21.18 R120.2
SERIAL_UPLOAD_PASS: JP2.16 R19.2
SERIAL_UPLOAD_PASS1: JP4.16 R39.2
SERIAL_UPLOAD_PASS2: JP9.16 R59.2
SERIAL_UPLOAD_PASS3: JP13.16 R79.2
SERIAL_UPLOAD_PASS4: JP17.16 R99.2
SERIAL_UPLOAD_PASS5: JP21.16 R119.2
SHUTDOWN: JP2.29 R7.2 S1.1
SHUTDOWN1: JP4.29 R27.2 S2.1
SHUTDOWN2: JP9.29 R47.2 S3.1
SHUTDOWN3: JP13.29 R67.2 S4.1
SHUTDOWN4: JP17.29 R87.2 S5.1
SHUTDOWN5: JP21.29 R107.2 S6.1
TXO: JP2.8
TXO1: JP4.8
TXO2: JP9.8
TXO3: JP13.8
TXO4: JP17.8
TXO5: JP21.8
VCC_T: J1.6 JP5.2
VCC_T1: J2.6 JP6.2
VCC_T2: J3.6 JP10.2
VCC_T3: J4.6 JP14.2
VCC_T4: J5.6 JP18.2
VCC_T5: J6.6 JP22.2